# Altium PCB 插槽板.pcbdoc
Units mil, origin at the board's own origin, x right, y up, seen from the top; angles counter-clockwise.
Board outline 7231.36 x 4899.99 mil, 2 copper layers (Top Layer, Bottom Layer); 25 components, 57 nets, 197 pads, 15 vias.
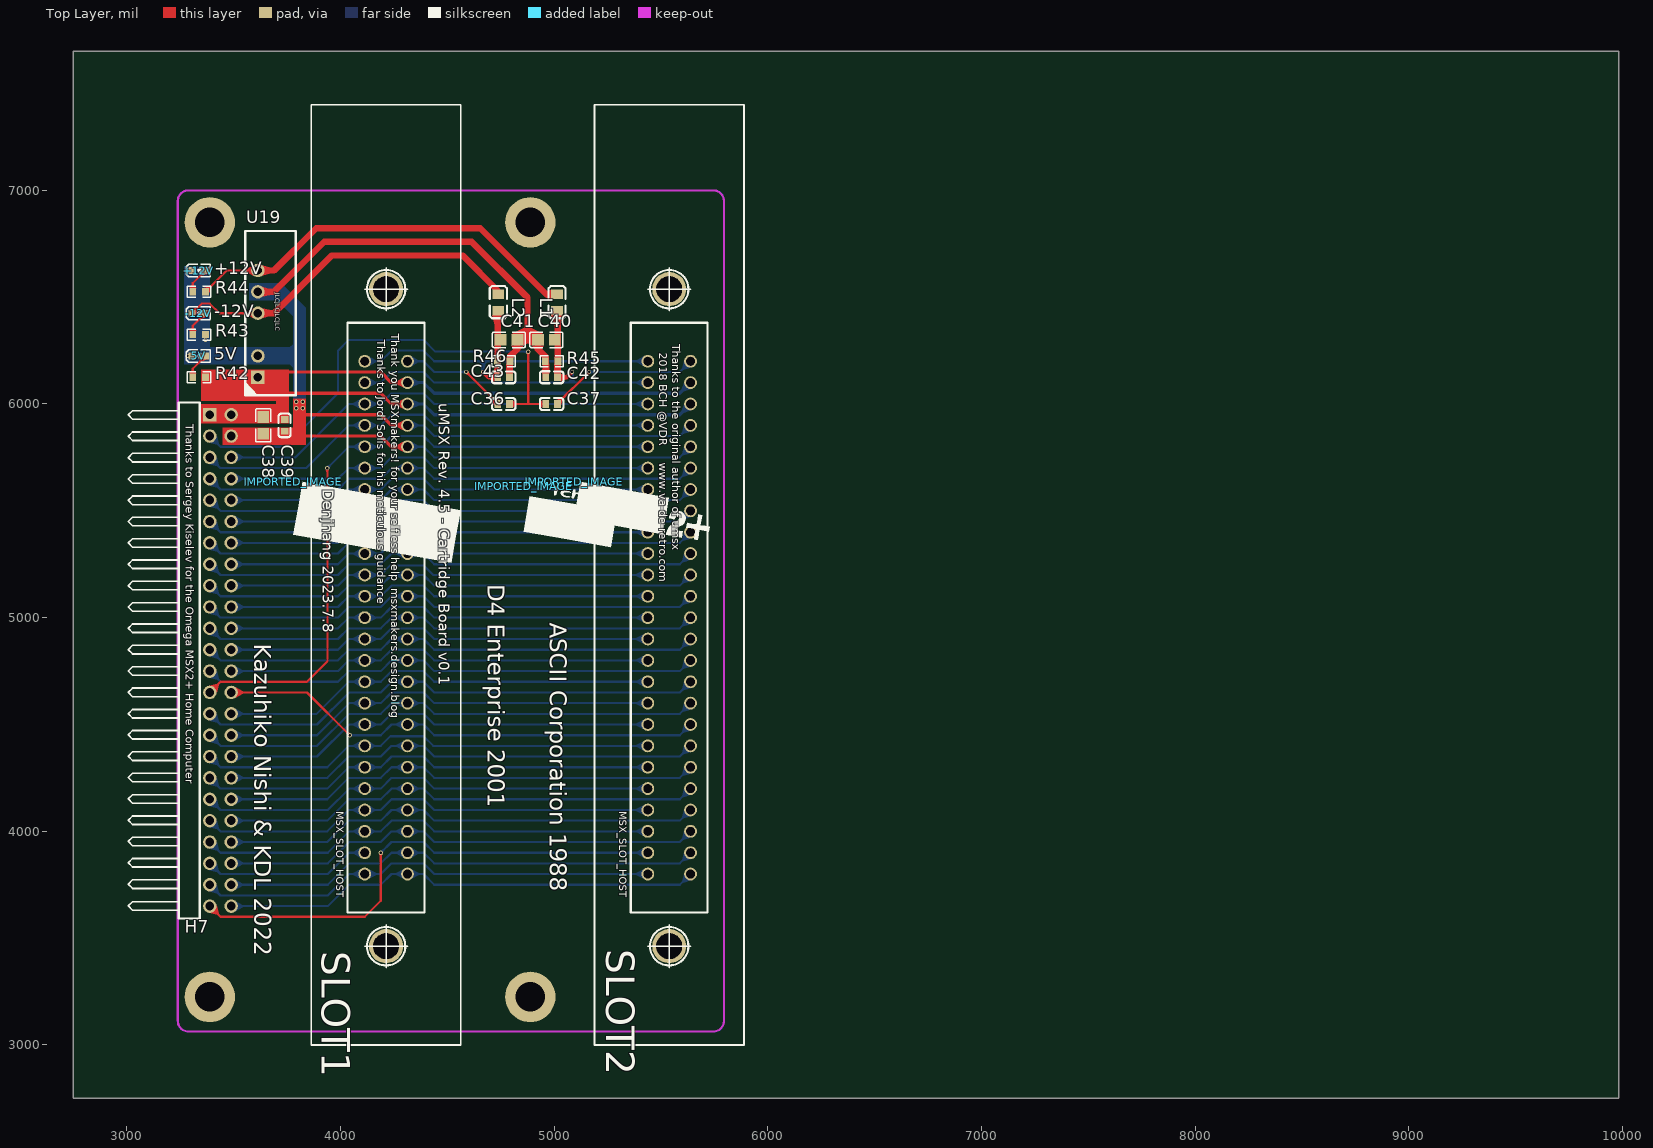
[diagram p0: Top Layer view]
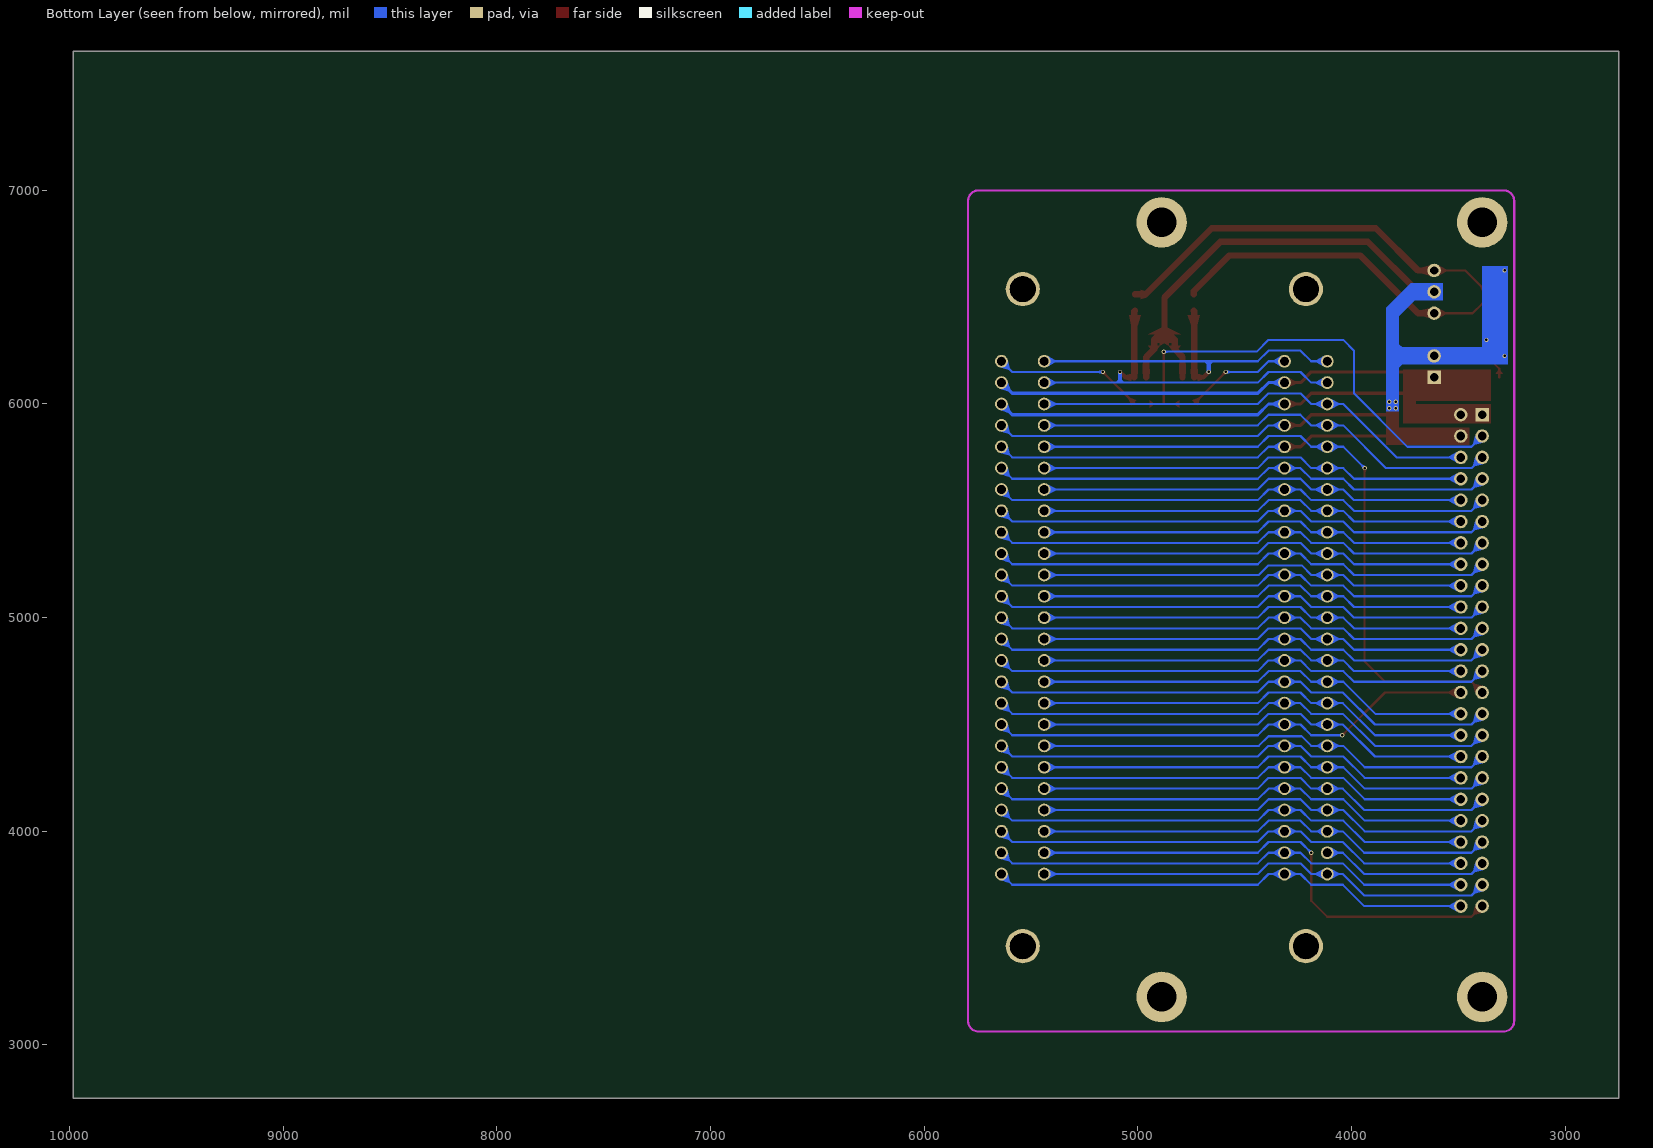
[diagram p1: Bottom Layer view, seen from below]

## Layer stack, top to bottom
Top Layer: signal copper (thickness not stored)
Dielectric: dielectric 12.6, FR-4, Dk 4.8
Bottom Layer: signal copper (thickness not stored)

## Board outline
9981.36,2750 2750,2750 2750,7649.99 9981.36,7649.99

## Components (designator, comment, footprint, x,y, rotation, side; value= is the part's Value field where it differs from the comment)
5V "LED_0603-R" LED_0603 3338.25,6224.97 r0 top
+12V "LED_0603-R" LED_0603 3338.25,6624.97 r0 top
-12V "LED_0603-R" LED_0603 3338.25,6424.97 r0 top
C36 "CAP_0603" C0603 4763.25,5999.97 r180 top
C37 "CAP_0603" C0603 4988.25,5999.97 r0 top
C38 "CL21A476MQYNNNE" C0805 3638.25,5899.97 r90 top
C39 "CAP_0603" C0603 3738.25,5899.97 r90 top
C40 "CL21A476MQYNNNE" C0805 4963.25,6299.97 r0 top
C41 "CL21A476MQYNNNE" C0805 4788.25,6299.97 r0 top
C42 "CAP_0603" C0603 4988.25,6124.97 r0 top
C43 "CAP_0603" C0603 4763.25,6124.97 r180 top
H7 "X6521WR-2x24H-C30D60" HDR-TH_48P-P2.54-H-M-R2-C24-S2.54 3438.25,4799.97 r270 top
IMPORTED_IMAGE "IMPORTED_IMAGE" IMPORTED_IMAGE 5092.88,5634.97 r0 top
IMPORTED_IMAGE "IMPORTED_IMAGE" IMPORTED_IMAGE 4856.67,5615.63 r0 top
IMPORTED_IMAGE "IMPORTED_IMAGE" IMPORTED_IMAGE 3779.24,5634.97 r0 top
L1 "A-6-9007-2" L0805 5013.25,6474.97 r270 top
L2 "A-6-9007-2" L0805 4738.25,6474.97 r270 top
R42 "0603WAF1001T5E" R0603 3338.25,6124.97 r180 top
R43 "0603WAF1001T5E" R0603 3338.25,6324.97 r180 top
R44 "0603WAF1001T5E" R0603 3338.25,6524.97 r180 top
R45 "0603WAF2001T5E" R0603 4988.25,6199.97 r0 top
R46 "0603WAF2001T5E" R0603 4763.25,6199.97 r180 top
SLOT1 "MSX_SLOT_HOST" CONN_EDGE_50P 4213.25,4999.97 r270 top
SLOT2 "MSX_SLOT_HOST" CONN_EDGE_50P 5538.25,4999.97 r270 top
U19 "A0512S-1W" PWRM-TH_7P-L19.5-W6.0-P2.54-PE3_7 3613.25,6374.97 r90 top

## Footprints (in the part's own frame and the unit in brackets; to place one, negate y for a bottom-side part, rotate by r counter-clockwise, add the part's x,y. Pads: shape width x height; smd on the part's side, far side on the other; paste and mask are expansions set on the pad)
C0603 [mm]
  rect 0.8x0.9 smd: 1(-0.7,0) 2(0.7,0)
  silkscreen extent -1.41,-0.71 1.39,0.72
C0805 [mm]
  rect 1.41x1.35 smd: 1(-1,0) 2(1,0)
  silkscreen extent -1.96,-0.9 1.96,0.9
CONN_EDGE_50P [mil]
  round 160 hole 120 slot 120.2 at 0 deg: 0(-1537.52,0) 0(1537.47,0)
  round 60 hole 40 slot 40.2 at 0 deg: 1(1199.97,100) 2(1199.97,-100) 3(1099.97,100) 4(1099.97,-100) 5(999.97,100) 6(999.97,-100) 7(899.97,100) 8(899.97,-100) 9(799.97,100) 10(799.97,-100) 11(699.97,100) 12(699.97,-100) 13(599.97,100) 14(599.97,-100) 15(499.97,100) 16(499.97,-100) 17(399.97,100) 18(399.97,-100) 19(299.97,100) 20(299.97,-100) 21(199.97,100) 22(199.97,-100) 23(99.97,100) 24(99.97,-100) 25(-0.03,100) 26(-0.03,-100) 27(-100.02,100) 28(-100.02,-100) 29(-200.02,100) 30(-200.02,-100) 31(-300.02,100) 32(-300.02,-100) 33(-400.02,100) 34(-400.02,-100) 35(-500.02,100) 36(-500.02,-100) 37(-600.02,100) 38(-600.02,-100) 39(-700.02,100) 40(-700.02,-100) 41(-800.02,100) 42(-800.02,-100) 43(-900.02,100) 44(-900.02,-100) 45(-1000.02,100) 46(-1000.02,-100) 47(-1100.02,100) 48(-1100.02,-100) 49(-1200.02,100) 50(-1200.02,-100)
  silkscreen extent -2400,-350 2000,350
HDR-TH_48P-P2.54-H-M-R2-C24-S2.54 [mm]
  rect 1.6x1.6 hole 1.05: 1(-29.21,-1.27)
  round 1.6 hole 1.05: 2(-29.21,1.27) 3(-26.67,-1.27) 4(-26.67,1.27) 5(-24.13,-1.27) 6(-24.13,1.27) 7(-21.59,-1.27) 8(-21.59,1.27) 9(-19.05,-1.27) 10(-19.05,1.27) 11(-16.51,-1.27) 12(-16.51,1.27) 13(-13.97,-1.27) 14(-13.97,1.27) 15(-11.43,-1.27) 16(-11.43,1.27) 17(-8.89,-1.27) 18(-8.89,1.27) 19(-6.35,-1.27) 20(-6.35,1.27) 21(-3.81,-1.27) 22(-3.81,1.27) 23(-1.27,-1.27) 24(-1.27,1.27) 25(1.27,-1.27) 26(1.27,1.27) 27(3.81,-1.27) 28(3.81,1.27) 29(6.35,-1.27) 30(6.35,1.27) 31(8.89,-1.27) 32(8.89,1.27) 33(11.43,-1.27) 34(11.43,1.27) 35(13.97,-1.27) 36(13.97,1.27) 37(16.51,-1.27) 38(16.51,1.27) 39(19.05,-1.27) 40(19.05,1.27) 41(21.59,-1.27) 42(21.59,1.27) 43(24.13,-1.27) 44(24.13,1.27) 45(26.67,-1.27) 46(26.67,1.27) 47(29.21,-1.27) 48(29.21,1.27)
  silkscreen extent -30.67,-10.97 30.67,-2.47
IMPORTED_IMAGE [mil]
  silkscreen extent 0,-271 635,0
L0805 [mil]
  rect 44.59x54.21 smd: 1(-38.04,0) 2(38.04,0)
  silkscreen extent -77,-40 73,40
LED_0603 [mil]
  rect 31.5x31.5 smd: 1(-33.5,-0.4) 2(29.5,-0.2)
  silkscreen extent -61,-30 53,30
PWRM-TH_7P-L19.5-W6.0-P2.54-PE3_7 [mm]
  rect 1.6x1.6 hole 1: 1(-6.35,0)
  round 1.6 hole 1: 2(-3.81,0) 4(1.27,0) 5(3.81,0) 6(6.35,0)
  silkscreen extent -8.51,-4.5 11.02,1.52
R0603 [mil]
  rect 31.75x34.02 smd: 1(-29.66,0) 2(29.66,0)
  silkscreen extent -55,-26 55,26

## Free pads (board coordinates)
  round 236.22 hole 137.8: 1(3388.25,3224.97) 1(3388.25,6849.97) 1(4888.25,3224.97) 1(4888.25,6849.97)

## Via types
v1: diameter 20, hole 12, Top Layer to Bottom Layer, 15 vias

## Nets (pads, with @x,y where several pads share a name; then routed paths per layer and width w, separated by ;. In a path a pad name is that pad's centre, name@x,y a point inside that pad or via, vN(x,y) a via of type N, cw(c..) or ccw(c..) an arc to the next point about the centre after c; other vN are vias at no path point)
$2N2106: C36.2 SLOT1.49 | length 506.8
  Top Layer w10: v1(4588.25,6149.97) 4735.69,6002.53 C36.2
  Bottom Layer w10: SLOT1.49 4388.23,6199.99 4438.25,6149.97 v1(4588.25,6149.97)
$2N2130: C37.2 SLOT2.49 | length 706.8
  Top Layer w10: C37.2 5015.81,6002.53 v1(5163.25,6149.97)
  Bottom Layer w10: v1(5163.25,6149.97) 5588.23,6149.97 SLOT2.49
$2N2392: 5V.2 R42.2 | length 124.3
  Top Layer w10: R42.2 3308.59,6165.61 5V.2
$2N2395: -12V.2 R43.2 | length 124.3
  Top Layer w10: R43.2 3308.59,6365.61 -12V.2
$2N2398: +12V.2 R44.2 | length 124.3
  Top Layer w10: R44.2 3308.59,6565.61 +12V.2
A0: H7.20 SLOT1.28 SLOT2.28 | length 2012.1
  Bottom Layer w10: H7.20 3988.25,5049.97 4038.25,5099.97 SLOT1.28@4113.23,5099.97 ; SLOT1.28 4188.27,5099.99 4238.25,5149.97 4388.25,5149.97 4438.23,5099.99 SLOT2.28
A1: H7.19 SLOT1.27 SLOT2.27 | length 2353.6
  Bottom Layer w10: H7.19 3438.25,4999.97 3988.25,4999.97 4038.25,5049.97 4188.25,5049.97 4238.27,5099.99 SLOT1.27 4388.23,5099.99 4438.25,5049.97 5588.23,5049.97 SLOT2.27
A2: H7.18 SLOT1.30 SLOT2.30 | length 2008
  Bottom Layer w10: H7.18 3988.25,5149.97 4038.25,5199.97 SLOT1.30@4113.23,5199.97 ; SLOT1.30 4188.27,5199.99 4233.25,5244.97 4388.25,5244.97 4433.23,5199.99 SLOT2.30
A3: H7.17 SLOT1.29 SLOT2.29 | length 2353.6
  Bottom Layer w10: H7.17 3438.25,5099.97 3988.25,5099.97 4038.25,5149.97 4188.25,5149.97 4238.27,5199.99 SLOT1.29 4388.23,5199.99 4438.25,5149.97 5588.23,5149.97 SLOT2.29
A4: H7.16 SLOT1.32 SLOT2.32 | length 2012.1
  Bottom Layer w10: H7.16 3988.25,5249.97 4038.25,5299.97 SLOT1.32@4113.23,5299.97 ; SLOT1.32 4188.27,5299.99 4238.25,5349.97 4388.25,5349.97 4438.23,5299.99 SLOT2.32
A5: H7.15 SLOT1.31 SLOT2.31 | length 2353.6
  Bottom Layer w10: H7.15 3438.25,5199.97 3988.25,5199.97 4038.25,5249.97 4188.25,5249.97 4238.27,5299.99 SLOT1.31 4388.23,5299.99 4438.25,5249.97 5588.23,5249.97 SLOT2.31
A6: H7.26 SLOT1.22 SLOT2.22 | length 2012.1
  Bottom Layer w10: H7.26 3988.25,4749.97 4038.25,4799.97 SLOT1.22@4113.22,4799.97 ; SLOT1.22 4188.28,4800 4238.25,4849.97 4388.26,4849.97 4438.23,4800 SLOT2.22
A7: H7.25 SLOT1.21 SLOT2.21 | length 2353.6
  Bottom Layer w10: H7.25 3438.25,4699.97 3988.25,4699.97 4038.25,4749.97 4188.25,4749.97 4238.28,4800 SLOT1.21 4388.22,4800 4438.25,4749.97 5588.22,4749.97 SLOT2.21
A8: H7.24 SLOT1.24 SLOT2.24 | length 2012.1
  Bottom Layer w10: H7.24 3988.25,4849.97 4038.25,4899.97 SLOT1.24@4113.22,4899.97 ; SLOT1.24 4188.28,4900 4238.25,4949.97 4388.26,4949.97 4438.23,4900 SLOT2.24
A9: H7.31 SLOT1.17 SLOT2.17 | length 2395
  Bottom Layer w10: H7.31 3438.25,4399.97 3890.22,4399.97 4040.22,4549.97 4188.25,4549.97 4238.28,4600 SLOT1.17 4388.22,4600 4438.25,4549.97 5588.22,4549.97 SLOT2.17
A10: H7.30 SLOT1.20 SLOT2.20 | length 2053.5
  Bottom Layer w10: H7.30 3888.25,4549.97 4038.28,4700 SLOT1.20 4188.28,4700 4238.25,4749.97 4388.25,4749.97 4438.22,4700 SLOT2.20
A11: H7.29 SLOT1.19 SLOT2.19 | length 2395
  Bottom Layer w10: H7.29 3438.25,4499.97 3890.22,4499.97 4040.22,4649.97 4188.25,4649.97 4238.28,4700 SLOT1.19 4388.22,4700 4438.25,4649.97 5588.22,4649.97 SLOT2.19
A12: H7.23 SLOT1.23 SLOT2.23 | length 2353.6
  Bottom Layer w10: H7.23 3438.25,4799.97 3988.25,4799.97 4038.25,4849.97 4188.25,4849.97 4238.28,4900 SLOT1.23 4388.23,4900 4438.26,4849.97 5588.22,4849.97 SLOT2.23
A13: H7.22 SLOT1.26 SLOT2.26 | length 2012.1
  Bottom Layer w10: H7.22 3988.25,4949.97 4038.25,4999.97 SLOT1.26@4113.22,4999.97 ; SLOT1.26 4188.27,5000 4238.24,5049.97 4388.26,5049.97 4438.23,5000 SLOT2.26
A14: H7.21 SLOT1.25 SLOT2.25 | length 2353.6
  Bottom Layer w10: H7.21 3438.25,4899.97 3988.25,4899.97 4038.25,4949.97 4188.25,4949.97 4238.28,5000 SLOT1.25 4388.23,5000 4438.26,4949.97 5588.22,4949.97 SLOT2.25
A15: H7.32 SLOT1.18 SLOT2.18 | length 2053.5
  Bottom Layer w10: H7.32 3890.22,4449.97 4040.25,4600 SLOT1.18 4188.28,4600 4238.25,4649.97 4388.25,4649.97 4438.22,4600 SLOT2.18
BDIR: H7.37 SLOT1.10 SLOT2.10 | length 2198.5
  Bottom Layer w10: H7.37 3438.25,4099.97 3940.22,4099.97 4040.22,4199.97 SLOT1.10 4158.19,4199.97 ; SLOT1.10 4158.19,4200 4188.28,4200 4238.25,4249.97 4388.25,4249.97 4438.22,4200 SLOT2.10
CLOCK: H7.27 SLOT1.42 SLOT2.42 | length 3097.9
  Top Layer w10: H7.27 3438.25,4699.97 3843.25,4699.97 3938.25,4794.97 v1(3938.25,5699.97)
  Bottom Layer w10: v1(3938.25,5699.97) 4038.27,5799.99 SLOT1.42 4188.25,5799.99 4238.23,5849.97 4388.27,5849.97 4438.25,5799.99 SLOT2.42
CS1: H7.48 SLOT1.1 SLOT2.1 | length 2253.6
  Bottom Layer w10: H7.48 3940.22,3649.97 4040.22,3749.97 4188.24,3749.97 4238.27,3800 SLOT1.1 4388.22,3800 4438.25,3749.97 5588.22,3749.97 SLOT2.1
CS2: H7.45 SLOT1.2 SLOT2.2 | length 2153.5
  Bottom Layer w10: H7.45 3438.25,3699.97 3940.22,3699.97 4040.25,3800 SLOT1.2 4188.27,3800 4238.24,3849.97 4388.25,3849.97 4438.22,3800 SLOT2.2
CS12: H7.46 SLOT1.3 SLOT2.3 | length 2253.6
  Bottom Layer w10: H7.46 3940.22,3749.97 4040.22,3849.97 4188.25,3849.97 4238.28,3900 SLOT1.3 4388.22,3900 4438.25,3849.97 5588.22,3849.97 SLOT2.3
D0: H7.14 SLOT1.34 SLOT2.34 | length 2012.1
  Bottom Layer w10: H7.14 3988.25,5349.97 4038.25,5399.97 SLOT1.34@4113.23,5399.97 ; SLOT1.34 4188.27,5399.99 4238.25,5449.97 4388.25,5449.97 4438.23,5399.99 SLOT2.34
D1: H7.13 SLOT1.33 SLOT2.33 | length 2353.6
  Bottom Layer w10: H7.13 3438.25,5299.97 3988.25,5299.97 4038.25,5349.97 4188.25,5349.97 4238.27,5399.99 SLOT1.33 4388.23,5399.99 4438.25,5349.97 5588.23,5349.97 SLOT2.33
D2: H7.12 SLOT1.36 SLOT2.36 | length 2012.1
  Bottom Layer w10: H7.12 3988.25,5449.97 4038.25,5499.97 SLOT1.36@4113.23,5499.97 ; SLOT1.36 4188.27,5499.99 4238.25,5549.97 4388.25,5549.97 4438.23,5499.99 SLOT2.36
D3: H7.11 SLOT1.35 SLOT2.35 | length 2353.6
  Bottom Layer w10: H7.11 3438.25,5399.97 3988.25,5399.97 4038.25,5449.97 4188.25,5449.97 4238.27,5499.99 SLOT1.35 4388.23,5499.99 4438.25,5449.97 5588.23,5449.97 SLOT2.35
D4: H7.10 SLOT1.38 SLOT2.38 | length 2012.1
  Bottom Layer w10: H7.10 3988.25,5549.97 4038.27,5599.99 SLOT1.38 4188.27,5599.99 4238.25,5649.97 4388.25,5649.97 4438.23,5599.99 SLOT2.38
D5: H7.9 SLOT1.37 SLOT2.37 | length 2353.6
  Bottom Layer w10: H7.9 3438.25,5499.97 3988.25,5499.97 4038.25,5549.97 4188.25,5549.97 4238.27,5599.99 SLOT1.37 4388.23,5599.99 4438.25,5549.97 5588.23,5549.97 SLOT2.37
D6: H7.8 SLOT1.40 SLOT2.40 | length 2012.1
  Bottom Layer w10: H7.8 3988.25,5649.97 4038.27,5699.99 SLOT1.40 4188.27,5699.99 4238.25,5749.97 4388.25,5749.97 4438.23,5699.99 SLOT2.40
D7: H7.7 SLOT1.39 SLOT2.39 | length 2353.6
  Bottom Layer w10: H7.7 3438.25,5599.97 3988.27,5599.97 4038.27,5649.97 4188.25,5649.97 4238.27,5699.99 SLOT1.39 4388.23,5699.99 4438.25,5649.97 5588.23,5649.97 SLOT2.39
GND: 5V.1 +12V.1 C38.1 C39.1 C40.1 C41.2 C42.1 C43.1 H7.4 R43.1 R45.1 R46.1 SLOT1.41 SLOT1.43 SLOT2.41 SLOT2.43 U19.2 U19.5 | length 6013
  Top Layer w15: 3833.25,5849.97 4188.25,5849.97 4238.23,5799.99 SLOT1.41 ; 3833.25,5949.97 4188.25,5949.97 4238.23,5899.99 SLOT1.43
  Top Layer w30: U19.5 3688.25,6524.97 3923.25,6759.97 4613.25,6759.97 4875.12,6498.1 4875.12,6348.73 ; C43.1 4790.81,6219.59 4827.62,6256.4 C41.2 ; C42.1 4960.69,6219.59 4923.88,6256.4 C40.1 ; C41.2 4875.12,6299.97 ; C41.2 4875.12,6347.47 ; 4875.12,6299.97 4875.12,6347.47 ; 4875.12,6299.97 C40.1 ; 4875.12,6347.47 4875.12,6348.73 ; 4875.12,6348.73 C40.1
  Bottom Layer w10: SLOT1.41 4388.23,5799.99 4438.25,5749.97 5588.23,5749.97 SLOT2.41 ; SLOT1.43 4388.23,5899.99 4438.25,5849.97 5588.23,5849.97 SLOT2.43
  other v1: 3793.25,5979.97 3823.25,5979.97 3793.25,6009.97 3823.25,6009.97 3283.25,6224.97 3368.25,6299.97 3283.25,6624.97
INT: H7.39 SLOT1.8 SLOT2.8 | length 2198.5
  Bottom Layer w10: H7.39 3438.25,3999.97 3938.25,3999.97 4038.25,4099.97 SLOT1.8 4158.19,4099.97 ; SLOT1.8 4158.19,4100 4188.28,4100 4238.25,4149.97 4388.25,4149.97 4438.22,4100 SLOT2.8
IORQ: H7.38 SLOT1.11 SLOT2.11 | length 2253.6
  Bottom Layer w10: H7.38 3938.25,4149.97 4038.25,4249.97 4188.25,4249.97 4238.28,4300 SLOT1.11 4388.22,4300 4438.25,4249.97 5588.22,4249.97 SLOT2.11
M1: H7.40 SLOT1.9 SLOT2.9 | length 2253.6
  Bottom Layer w10: H7.40 3938.25,4049.97 4038.25,4149.97 4188.25,4149.97 4238.28,4200 SLOT1.9 4388.22,4200 4438.25,4149.97 5588.22,4149.97 SLOT2.9
MERQ: H7.35 SLOT1.12 SLOT2.12 | length 2153.5
  Bottom Layer w10: H7.35 3438.25,4199.97 3938.25,4199.97 4038.28,4300 SLOT1.12 4188.28,4300 4238.25,4349.97 4388.25,4349.97 4438.22,4300 SLOT2.12
RD: H7.33 SLOT1.14 SLOT2.14 | length 2194.3
  Bottom Layer w10: H7.33 3438.25,4299.97 3938.25,4299.97 4038.25,4399.97 SLOT1.14 4158.19,4399.97 ; SLOT1.14 4158.19,4400 4188.28,4400 4233.25,4444.97 4388.28,4444.97 4433.25,4400 SLOT2.14
RESET: H7.28 SLOT1.15 SLOT2.15 | length 2295
  Top Layer w10: H7.28 3843.25,4649.97 v1(4043.25,4449.97)
  Bottom Layer w10: v1(4043.25,4449.97) 4188.25,4449.97 4238.28,4500 SLOT1.15 4388.22,4500 4438.25,4449.97 5588.22,4449.97 SLOT2.15
RFSH: H7.41 SLOT1.6 SLOT2.6 | length 2198.5
  Bottom Layer w10: H7.41 3438.25,3899.97 3940.22,3899.97 4040.22,3999.97 SLOT1.6 4158.19,3999.97 ; SLOT1.6 4158.19,4000 4188.28,4000 4238.25,4049.97 4388.25,4049.97 4438.22,4000 SLOT2.6
RSV5: H7.44 SLOT1.5 SLOT2.5 | length 2253.6
  Bottom Layer w10: H7.44 3940.22,3849.97 4040.22,3949.97 4188.25,3949.97 4238.28,4000 SLOT1.5 4388.22,4000 4438.25,3949.97 5588.22,3949.97 SLOT2.5
RSV16: H7.34 SLOT1.16 SLOT2.16 | length 2053.5
  Bottom Layer w10: H7.34 3890.22,4349.97 4040.25,4500 SLOT1.16 4188.28,4500 4238.25,4549.97 4388.25,4549.97 4438.22,4500 SLOT2.16
SLTSL1: H7.43 SLOT1.4 | length 787.1
  Bottom Layer w10: H7.43 3438.25,3799.97 3940.22,3799.97 4040.22,3899.97 SLOT1.4
SLTSL2: H7.47 SLOT2.4 | length 2368.2
  Top Layer w10: H7.47 3438.25,3599.97 4113.25,3599.97 4188.25,3674.97 v1(4188.25,3899.97)
  Bottom Layer w10: v1(4188.25,3899.97) 4238.26,3949.97 4388.25,3949.97 4438.22,3900 SLOT2.4
SOUND_L: C36.1 C37.1 H7.3 | length 2273
  Top Layer w10: C36.1 4879.02,5999.97 ; v1(4878.25,6244.97) 4878.25,6000.73 4879.02,5999.97 ; C37.1 4879.02,5999.97
  Bottom Layer w10: H7.3 3438.25,5799.97 3738.25,5799.97 3988.25,6049.97 3988.25,6249.97 4038.25,6299.97 4388.25,6299.97 4443.25,6244.97 v1(4878.25,6244.97)
SW1: H7.5 SLOT1.44 SLOT2.44 | length 2195
  Bottom Layer w10: H7.5 3438.25,5699.97 3838.25,5699.97 4038.27,5899.99 SLOT1.44 4189.27,5899.99 4239.25,5949.97 4388.27,5949.97 4438.25,5899.99 SLOT2.44
SW2: H7.6 SLOT1.46 SLOT2.46 | length 2095
  Bottom Layer w10: H7.6 3789.23,5749.97 4039.25,5999.99 SLOT1.46 4188.25,5999.99 4238.23,6049.97 4388.27,6049.97 4438.25,5999.99 SLOT2.46
VCC5: C38.2 C39.2 H7.1 H7.2 R42.1 SLOT1.45 SLOT1.47 SLOT2.45 SLOT2.47 U19.1 | length 3914.3
  Top Layer w15: 3733.25,6149.97 4188.27,6149.97 4238.25,6099.99 SLOT1.47 ; 3753.25,6049.97 4188.27,6049.97 4238.25,5999.99 SLOT1.45
  Bottom Layer w15: SLOT1.45 4388.23,5999.99 4438.25,5949.97 5588.23,5949.97 SLOT2.45 ; SLOT1.47 4388.23,6099.99 4438.25,6049.97 5588.23,6049.97 SLOT2.47
VCC12: L1.1 R44.1 U19.6 | length 1897.2
  Top Layer w10: R44.1 3467.91,6624.97 U19.6
  Top Layer w30: U19.6 3688.25,6624.97 3886.29,6823.01 4653.25,6823.01 4963.25,6513.01 L1.1
VCC12L: C40.2 C42.2 L1.2 R45.2 SLOT1.48 SLOT2.48 | length 1844.1
  Top Layer w20: C42.2 5058.25,6124.97 v1(5083.25,6149.97)
  Top Layer w30: L1.2 5015.81,6434.37 C42.2
  Bottom Layer w10: SLOT1.48 4188.27,6099.99 4238.25,6149.97 4388.25,6149.97 4438.25,6099.97 5066.66,6099.97 ; SLOT2.48@5438.23,6099.97 5099.85,6099.97 ; 5066.66,6099.97 5083.25,6116.57 5099.85,6099.97 ; 5066.66,6099.97 5099.85,6099.97
  Bottom Layer w20: 5083.25,6109.97 5083.25,6116.57 v1(5083.25,6149.97)
VCCM12: -12V.1 L2.1 U19.4 | length 1666.9
  Top Layer w10: -12V.1 3350.15,6469.97 3388.25,6469.97 3433.25,6424.97 U19.4
  Top Layer w30: U19.4 3688.25,6424.97 3958.25,6694.97 4571.29,6694.97 4738.25,6528.01 L2.1
VCCM12L: C41.1 C43.2 L2.2 R46.2 SLOT1.50 SLOT2.50 | length 1846.9
  Top Layer w20: v1(4668.25,6149.97) 4693.25,6124.97 C43.2
  Top Layer w30: C43.2 4735.69,6434.37 L2.2
  Bottom Layer w10: SLOT1.50 4188.27,6199.99 4238.25,6249.97 4388.25,6249.97 4438.25,6199.97 4650.69,6199.97 ; SLOT2.50@5438.23,6199.97 4685.81,6199.97 ; 4650.69,6199.97 4668.25,6182.41 4685.81,6199.97 ; 4650.69,6199.97 4685.81,6199.97
  Bottom Layer w20: v1(4668.25,6149.97) 4668.25,6182.41 4668.25,6189.97
WAIT: H7.42 SLOT1.7 SLOT2.7 | length 2253.6
  Bottom Layer w10: H7.42 3938.25,3949.97 4038.25,4049.97 4188.25,4049.97 4238.28,4100 SLOT1.7 4388.22,4100 4438.25,4049.97 5588.22,4049.97 SLOT2.7
WR: H7.36 SLOT1.13 SLOT2.13 | length 2253.6
  Bottom Layer w10: H7.36 3938.25,4249.97 4038.25,4349.97 4188.25,4349.97 4238.28,4400 SLOT1.13 4388.22,4400 4438.25,4349.97 5588.22,4349.97 SLOT2.13
"": pad.1 SLOT1.0 SLOT2.0

## Keep-outs
Board Outline Layer:
  lines w10 net "": 3238.25,3112.96 ccw(c3288.25,3112.96) 3288.25,3062.96 5744.35,3062.96 ccw(c5744.35,3112.96) 5794.35,3112.96 5794.35,6949.97 ccw(c5744.35,6949.97) 5744.35,6999.97 3288.25,6999.97 ccw(c3288.25,6949.97) 3238.25,6949.97 3238.25,3112.96

## Other copper
Top Layer:
  region net GND: 3448.25,5809.97 3838.25,5809.97 3838.25,5889.97 3448.25,5889.97
  region net GND: 3778.25,5879.97 3838.25,5879.97 3838.25,6024.97 3778.25,6024.97
  region net VCC5: 3348.25,5909.97 3758.25,5909.97 3758.25,6159.97 3348.25,6159.97 3348.25,6014.97 3698.25,6014.97 3698.25,5999.97 3348.25,5999.97
  region net VCC12L: 5000.81,6187.69 5000.06,6142.69 5031.56,6142.69 5030.81,6187.69
  region net VCC12L: 5058.25,6114.97 5058.25,6134.97 5031.56,6142.69 5031.56,6107.25
  region net GND: 4945.69,6187.69 4944.94,6142.69 4976.44,6142.69 4975.69,6187.69
  region net CLOCK: 3419.69,4648 3429.65,4684.3 3422.58,4691.37 3386.28,4681.4
  region net RESET: 3509.08,4626.35 3541.79,4644.97 3541.79,4654.97 3509.08,4673.59
  region net SLTSL2: 3386.28,3618.54 3422.58,3608.57 3429.65,3615.64 3419.69,3651.94
  region net VCC12: 4963.25,6498.01 4986.14,6490.72 4986.14,6535.3 4963.25,6528.01
  region net VCC12L: 5000.81,6369.64 5030.81,6369.64 5040.36,6414.64 4986.14,6414.64
  region net VCCM12: 3634.08,6401.35 3666.79,6409.97 3666.79,6439.97 3634.08,6448.59
  region net VCCM12: 3592.42,6448.59 3559.71,6429.97 3559.71,6419.97 3592.42,6401.35
  region net VCC12: 3592.42,6648.59 3559.71,6629.97 3559.71,6619.97 3592.42,6601.35
  region net VCC12: 3634.08,6601.35 3666.79,6609.97 3666.79,6639.97 3634.08,6648.59
  region net GND: 3634.08,6501.35 3666.79,6509.97 3666.79,6539.97 3634.08,6548.59
  region net $2N2130: 5042.17,6021.81 5034.5,6028.29 5006.22,6017.69 5031.56,5993.53
  region net SOUND_L: 4929.94,5994.97 4944.94,5982.47 4944.94,6017.47 4929.94,6004.97
  region net $2N2106: 4717,6028.29 4709.34,6021.81 4719.94,5993.53 4745.28,6017.69
  region net SOUND_L: 4821.56,5994.97 4821.56,6004.97 4806.56,6017.47 4806.56,5982.47
  region net $2N2392: 3341.39,6205.48 3348.47,6198.41 3376.75,6209.02 3352,6233.77
  region net $2N2398: 3341.39,6605.48 3348.47,6598.41 3376.75,6609.02 3352,6633.77
  region net VCCM12: 3324.04,6450.93 3295.75,6440.32 3320.5,6415.57 3331.11,6443.86
  region net $2N2395: 3341.39,6405.48 3348.47,6398.41 3376.75,6409.02 3352,6433.77
  region net GND: 4864.51,6358.08 4799.86,6326.55 4855.38,6326.55 4885.73,6336.86
  region net GND: 4812.62,6256.4 4842.62,6256.4 4855.38,6273.4 4799.86,6273.4
  region net GND: 4875.12,6284.97 4875.12,6314.97 4855.38,6326.55 4855.38,6273.4
  region net GND: 4864.51,6338.12 4896.12,6326.55 4951.64,6326.55 4886.7,6358.36
  region net GND: 4908.88,6256.4 4938.88,6256.4 4951.64,6273.4 4896.12,6273.4
  region net GND: 4875.12,6284.97 4896.12,6273.4 4896.12,6326.55 4875.12,6314.97
  region net VCCM12L: 4693.25,6134.97 4693.25,6114.97 4719.94,6107.25 4719.94,6142.69
  region net VCCM12L: 4720.69,6187.69 4719.94,6142.69 4751.44,6142.69 4750.69,6187.69
  region net GND: 4775.81,6187.69 4775.06,6142.69 4806.56,6142.69 4805.81,6187.69
  region net $2N2398: 3303.59,6556.98 3292.72,6541.98 3324.47,6541.98 3313.59,6556.98
  region net VCC12: 3388.45,6552.58 3360.17,6541.98 3383.79,6516.1 3394.39,6544.38
  region net $2N2395: 3303.59,6356.98 3292.72,6341.98 3324.47,6341.98 3313.59,6356.98
  region net $2N2392: 3303.59,6156.98 3292.72,6141.98 3324.47,6141.98 3313.59,6156.98
  region net VCCM12L: 4720.69,6369.64 4750.69,6369.64 4765.36,6414.64 4711.14,6414.64
  region net $2N2130: 5153.27,6150.6 5147.69,6141.48 5154.77,6134.41 5163.88,6139.99
  region net $2N2106: 4587.62,6139.99 4596.74,6134.41 4603.81,6141.48 4598.23,6150.6
  region net SOUND_L: 4870.75,6238.36 4873.25,6227.97 4883.25,6227.97 4885.75,6238.36
  region net RESET: 4043.88,4459.95 4034.77,4465.53 4027.69,4458.46 4033.27,4449.34
  region net SLTSL2: 4180.75,3893.36 4183.25,3882.97 4193.25,3882.97 4195.75,3893.36
  region net CLOCK: 3930.75,5693.36 3933.25,5682.97 3943.25,5682.97 3945.75,5693.36
  region net GND: 4293.41,5822.49 4262.25,5807.49 4262.25,5792.49 4293.41,5777.49
  region net GND: 4293.41,5922.49 4262.25,5907.49 4262.25,5892.49 4293.41,5877.49
  region net VCC5: 4293.41,6022.49 4262.25,6007.49 4262.25,5992.49 4293.41,5977.49
  region net VCC5: 4293.41,6122.49 4262.25,6107.49 4262.25,6092.49 4293.41,6077.49
Bottom Layer:
  region net GND: 3838.25,5964.97 3838.25,6449.97 3723.25,6564.97 3573.25,6564.97 3573.25,6484.97 3703.25,6484.97 3778.25,6409.97 3778.25,6279.97 3763.25,6264.97 3388.25,6264.97 3388.25,6644.97 3268.25,6644.97 3268.25,6184.97 3763.25,6184.97 3778.25,6169.97 3778.25,5964.97
  region net VCCM12L: 5418.39,6222.48 5387.25,6204.97 5387.25,6194.97 5418.42,6177.48
  region net $2N2130: 5608.31,6201.87 5598.65,6167.46 5605.72,6160.39 5640.13,6170.05
  region net VCC12L: 5418.39,6122.48 5387.25,6104.97 5387.25,6094.97 5418.42,6077.48
  region net VCC5: 5608.31,6101.87 5596.89,6069.23 5607.49,6058.62 5640.13,6070.05
  region net SW2: 5418.41,6022.49 5387.25,6004.99 5387.25,5994.99 5418.41,5977.49
  region net VCC5: 5608.31,6001.87 5596.89,5969.23 5607.49,5958.62 5640.13,5970.05
  region net SW1: 5418.41,5922.49 5387.25,5904.99 5387.25,5894.99 5418.41,5877.49
  region net GND: 5608.31,5901.87 5598.65,5867.46 5605.72,5860.39 5640.13,5870.05
  region net CLOCK: 5418.41,5822.49 5387.25,5804.99 5387.25,5794.99 5418.41,5777.49
  region net GND: 5608.31,5801.87 5598.65,5767.46 5605.72,5760.39 5640.13,5770.05
  region net D6: 5418.41,5722.49 5387.25,5704.99 5387.25,5694.99 5418.41,5677.49
  region net D7: 5608.31,5701.87 5598.65,5667.46 5605.72,5660.39 5640.13,5670.05
  region net D4: 5418.41,5622.49 5387.25,5604.99 5387.25,5594.99 5418.41,5577.49
  region net D5: 5608.31,5601.87 5598.65,5567.46 5605.72,5560.39 5640.13,5570.05
  region net D2: 5418.41,5522.49 5387.25,5504.99 5387.25,5494.99 5418.41,5477.49
  region net D3: 5608.31,5501.87 5598.65,5467.46 5605.72,5460.39 5640.13,5470.05
  region net D0: 5418.41,5422.49 5387.25,5404.99 5387.25,5394.99 5418.41,5377.49
  region net D1: 5608.31,5401.87 5598.65,5367.46 5605.72,5360.39 5640.13,5370.05
  region net A4: 5418.41,5322.49 5387.25,5304.99 5387.25,5294.99 5418.41,5277.49
  region net A5: 5608.31,5301.87 5598.65,5267.46 5605.72,5260.39 5640.13,5270.05
  region net A2: 5418.41,5222.49 5387.25,5204.99 5387.25,5194.99 5418.41,5177.49
  region net A3: 5608.31,5201.87 5598.65,5167.46 5605.72,5160.39 5640.13,5170.05
  region net A0: 5418.41,5122.49 5387.25,5104.99 5387.25,5094.99 5418.41,5077.49
  region net A1: 5608.31,5101.87 5598.65,5067.46 5605.72,5060.39 5640.13,5070.05
  region net A13: 5418.41,5022.5 5387.25,5005 5387.25,4995 5418.41,4977.5
  region net A14: 5608.31,5001.88 5598.65,4967.47 5605.72,4960.4 5640.13,4970.06
  region net A8: 5418.41,4922.5 5387.25,4905 5387.25,4895 5418.41,4877.5
  region net A12: 5608.31,4901.88 5598.65,4867.47 5605.72,4860.4 5640.13,4870.06
  region net A6: 5418.41,4822.5 5387.25,4805 5387.25,4795 5418.41,4777.5
  region net A7: 5608.31,4801.88 5598.65,4767.47 5605.72,4760.4 5640.13,4770.06
  region net A10: 5418.41,4722.5 5387.25,4705 5387.25,4695 5418.41,4677.5
  region net A11: 5608.31,4701.88 5598.65,4667.47 5605.72,4660.4 5640.13,4670.06
  region net A15: 5418.41,4622.5 5387.25,4605 5387.25,4595 5418.41,4577.5
  region net A9: 5608.31,4601.88 5598.65,4567.47 5605.72,4560.4 5640.13,4570.06
  region net RSV16: 5418.41,4522.5 5387.25,4505 5387.25,4495 5418.41,4477.5
  region net RESET: 5608.31,4501.88 5598.65,4467.47 5605.72,4460.4 5640.13,4470.06
  region net RD: 5418.41,4422.5 5387.25,4405 5387.25,4395 5418.41,4377.5
  region net WR: 5608.31,4401.88 5598.65,4367.47 5605.72,4360.4 5640.13,4370.06
  region net MERQ: 5418.41,4322.5 5387.25,4305 5387.25,4295 5418.41,4277.5
  region net IORQ: 5608.31,4301.88 5598.65,4267.47 5605.72,4260.4 5640.13,4270.06
  region net BDIR: 5418.41,4222.5 5387.25,4205 5387.25,4195 5418.41,4177.5
  region net M1: 5608.31,4201.88 5598.65,4167.47 5605.72,4160.4 5640.13,4170.06
  region net INT: 5418.41,4122.5 5387.25,4105 5387.25,4095 5418.41,4077.5
  region net WAIT: 5608.31,4101.88 5598.65,4067.47 5605.72,4060.4 5640.13,4070.06
  region net RFSH: 5418.41,4022.5 5387.25,4005 5387.25,3995 5418.41,3977.5
  region net RSV5: 5608.31,4001.88 5598.65,3967.47 5605.72,3960.4 5640.13,3970.06
  region net SLTSL2: 5418.41,3922.5 5387.25,3905 5387.25,3895 5418.41,3877.5
  region net CS12: 5608.31,3901.88 5598.65,3867.47 5605.72,3860.4 5640.13,3870.06
  region net CS2: 5418.41,3822.5 5387.25,3805 5387.25,3795 5418.41,3777.5
  region net CS1: 5608.31,3801.88 5598.65,3767.47 5605.72,3760.4 5640.13,3770.06
  region net D4: 3509.08,5526.35 3541.79,5544.97 3541.79,5554.97 3509.08,5573.59
  region net D5: 3386.28,5518.54 3422.58,5508.57 3429.65,5515.64 3419.69,5551.94
  region net D6: 3509.08,5626.35 3541.79,5644.97 3541.79,5654.97 3509.08,5673.59
  region net D7: 3386.28,5618.54 3422.58,5608.57 3429.65,5615.64 3419.69,5651.94
  region net SW2: 3509.08,5726.35 3541.79,5744.97 3541.79,5754.97 3509.08,5773.59
  region net SW1: 3386.28,5718.54 3422.58,5708.57 3429.65,5715.64 3419.69,5751.94
  region net SOUND_L: 3386.28,5818.54 3422.58,5808.57 3429.65,5815.64 3419.69,5851.94
  region net D3: 3386.28,5418.54 3422.58,5408.57 3429.65,5415.64 3419.69,5451.94
  region net D2: 3509.08,5426.35 3541.79,5444.97 3541.79,5454.97 3509.08,5473.59
  region net D1: 3386.28,5318.54 3422.58,5308.57 3429.65,5315.64 3419.69,5351.94
  region net D0: 3509.08,5326.35 3541.79,5344.97 3541.79,5354.97 3509.08,5373.59
  region net A5: 3386.28,5218.54 3422.58,5208.57 3429.65,5215.64 3419.69,5251.94
  region net A4: 3509.08,5226.35 3541.79,5244.97 3541.79,5254.97 3509.08,5273.59
  region net A3: 3386.28,5118.54 3422.58,5108.57 3429.65,5115.64 3419.69,5151.94
  region net A2: 3509.08,5126.35 3541.79,5144.97 3541.79,5154.97 3509.08,5173.59
  region net A1: 3386.28,5018.54 3422.58,5008.57 3429.65,5015.64 3419.69,5051.94
  region net A0: 3509.08,5026.35 3541.79,5044.97 3541.79,5054.97 3509.08,5073.59
  region net A14: 3386.28,4918.54 3422.58,4908.57 3429.65,4915.64 3419.69,4951.94
  region net A13: 3509.08,4926.35 3541.79,4944.97 3541.79,4954.97 3509.08,4973.59
  region net A12: 3386.28,4818.54 3422.58,4808.57 3429.65,4815.64 3419.69,4851.94
  region net A8: 3509.08,4826.35 3541.79,4844.97 3541.79,4854.97 3509.08,4873.59
  region net A7: 3386.28,4718.54 3422.58,4708.57 3429.65,4715.64 3419.69,4751.94
  region net A6: 3509.08,4726.35 3541.79,4744.97 3541.79,4754.97 3509.08,4773.59
  region net A11: 3386.28,4518.54 3422.58,4508.57 3429.65,4515.64 3419.69,4551.94
  region net A10: 3509.08,4526.35 3541.79,4544.97 3541.79,4554.97 3509.08,4573.59
  region net A9: 3386.28,4418.54 3422.58,4408.57 3429.65,4415.64 3419.69,4451.94
  region net A15: 3509.08,4426.35 3541.79,4444.97 3541.79,4454.97 3509.08,4473.59
  region net RD: 3386.28,4318.54 3422.58,4308.57 3429.65,4315.64 3419.69,4351.94
  region net RSV16: 3509.08,4326.35 3541.79,4344.97 3541.79,4354.97 3509.08,4373.59
  region net MERQ: 3386.28,4218.54 3422.58,4208.57 3429.65,4215.64 3419.69,4251.94
  region net WR: 3509.08,4226.35 3541.79,4244.97 3541.79,4254.97 3509.08,4273.59
  region net BDIR: 3386.28,4118.54 3422.58,4108.57 3429.65,4115.64 3419.69,4151.94
  region net IORQ: 3509.08,4126.35 3541.79,4144.97 3541.79,4154.97 3509.08,4173.59
  region net INT: 3386.28,4018.54 3422.58,4008.57 3429.65,4015.64 3419.69,4051.94
  region net M1: 3509.08,4026.35 3541.79,4044.97 3541.79,4054.97 3509.08,4073.59
  region net RFSH: 3386.28,3918.54 3422.58,3908.57 3429.65,3915.64 3419.69,3951.94
  region net WAIT: 3509.08,3926.35 3541.79,3944.97 3541.79,3954.97 3509.08,3973.59
  region net SLTSL1: 3386.28,3818.54 3422.58,3808.57 3429.65,3815.64 3419.69,3851.94
  region net RSV5: 3509.08,3826.35 3541.79,3844.97 3541.79,3854.97 3509.08,3873.59
  region net CS2: 3386.28,3718.54 3422.58,3708.57 3429.65,3715.64 3419.69,3751.94
  region net CS12: 3509.08,3726.35 3541.79,3744.97 3541.79,3754.97 3509.08,3773.59
  region net CS1: 3509.08,3626.35 3541.79,3644.97 3541.79,3654.97 3509.08,3673.59
  region net $2N2130: 5169.87,6142.47 5180.25,6144.97 5180.25,6154.97 5169.87,6157.47
  region net $2N2106: 4581.64,6157.47 4571.25,6154.97 4571.25,6144.97 4581.64,6142.47
  region net SOUND_L: 4871.64,6252.47 4861.25,6249.97 4861.25,6239.97 4871.64,6237.47
  region net RESET: 4049.87,4442.47 4060.25,4444.97 4060.25,4454.97 4049.87,4457.47
  region net SLTSL2: 4198.23,3899.34 4203.81,3908.45 4196.74,3915.52 4187.63,3909.95
  region net CLOCK: 3948.23,5699.34 3953.81,5708.46 3946.74,5715.53 3937.62,5709.95
  region net CS1: 4333.09,3777.5 4364.25,3795 4364.25,3805 4333.09,3822.5
  region net CS1: 4293.41,3822.5 4262.25,3805 4262.25,3795 4293.41,3777.5
  region net CS2: 4133.09,3777.5 4164.25,3795 4164.25,3805 4133.09,3822.5
  region net CS2: 4093.41,3822.5 4062.25,3805 4062.25,3795 4093.41,3777.5
  region net CS12: 4333.09,3877.5 4364.25,3895 4364.25,3905 4333.09,3922.5
  region net CS12: 4293.41,3922.5 4262.25,3905 4262.25,3895 4293.41,3877.5
  region net SLTSL1: 4093.39,3922.48 4062.25,3904.97 4062.26,3894.97 4093.43,3877.48
  region net RSV5: 4333.09,3977.5 4364.25,3995 4364.25,4005 4333.09,4022.5
  region net RSV5: 4293.41,4022.5 4262.25,4005 4262.25,3995 4293.41,3977.5
  region net RFSH: 4093.39,4022.48 4062.25,4004.97 4062.26,3994.97 4093.43,3977.48
  region net RFSH: 4133.09,3977.5 4158.19,3995 4158.19,4005 4133.09,4022.5
  region net RFSH: 4133.07,3977.48 4158.19,3994.97 4158.19,4004.97 4133.12,4022.48
  region net WAIT: 4333.09,4077.5 4364.25,4095 4364.25,4105 4333.09,4122.5
  region net WAIT: 4293.41,4122.5 4262.25,4105 4262.25,4095 4293.41,4077.5
  region net INT: 4133.09,4077.5 4158.19,4095 4158.19,4105 4133.09,4122.5
  region net INT: 4133.07,4077.48 4158.19,4094.97 4158.19,4104.97 4133.12,4122.48
  region net INT: 4093.39,4122.48 4062.25,4104.97 4062.26,4094.97 4093.43,4077.48
  region net M1: 4333.09,4177.5 4364.25,4195 4364.25,4205 4333.09,4222.5
  region net M1: 4293.41,4222.5 4262.25,4205 4262.25,4195 4293.41,4177.5
  region net BDIR: 4093.39,4222.48 4062.25,4204.97 4062.26,4194.97 4093.43,4177.48
  region net BDIR: 4133.09,4177.5 4158.19,4195 4158.19,4205 4133.09,4222.5
  region net BDIR: 4133.07,4177.48 4158.19,4194.97 4158.19,4204.97 4133.12,4222.48
  region net IORQ: 4333.09,4277.5 4364.25,4295 4364.25,4305 4333.09,4322.5
  region net IORQ: 4293.41,4322.5 4262.25,4305 4262.25,4295 4293.41,4277.5
  region net MERQ: 4133.09,4277.5 4164.25,4295 4164.25,4305 4133.09,4322.5
  region net MERQ: 4093.41,4322.5 4062.25,4305 4062.25,4295 4093.41,4277.5
  region net WR: 4333.09,4377.5 4364.25,4395 4364.25,4405 4333.09,4422.5
  region net WR: 4293.41,4422.5 4262.25,4405 4262.25,4395 4293.41,4377.5
  region net RD: 4133.09,4377.5 4158.19,4395 4158.19,4405 4133.09,4422.5
  region net RD: 4133.07,4377.48 4158.19,4394.97 4158.19,4404.97 4133.12,4422.48
  region net RD: 4093.39,4422.48 4062.25,4404.97 4062.26,4394.97 4093.43,4377.48
  region net RESET: 4333.09,4477.5 4364.25,4495 4364.25,4505 4333.09,4522.5
  region net RESET: 4293.41,4522.5 4262.25,4505 4262.25,4495 4293.41,4477.5
  region net RSV16: 4133.09,4477.5 4164.25,4495 4164.25,4505 4133.09,4522.5
  region net RSV16: 4093.41,4522.5 4062.25,4505 4062.25,4495 4093.41,4477.5
  region net A9: 4333.09,4577.5 4364.25,4595 4364.25,4605 4333.09,4622.5
  region net A9: 4293.41,4622.5 4262.25,4605 4262.25,4595 4293.41,4577.5
  region net A15: 4133.09,4577.5 4164.25,4595 4164.25,4605 4133.09,4622.5
  region net A15: 4093.41,4622.5 4062.25,4605 4062.25,4595 4093.41,4577.5
  region net A11: 4333.09,4677.5 4364.25,4695 4364.25,4705 4333.09,4722.5
  region net A11: 4293.41,4722.5 4262.25,4705 4262.25,4695 4293.41,4677.5
  region net A10: 4093.41,4722.5 4062.25,4705 4062.25,4695 4093.41,4677.5
  region net A10: 4133.09,4677.5 4164.25,4695 4164.25,4705 4133.09,4722.5
  region net A7: 4333.09,4777.5 4364.25,4795 4364.25,4805 4333.09,4822.5
  region net A7: 4293.41,4822.5 4262.25,4805 4262.25,4795 4293.41,4777.5
  region net A6: 4133.09,4777.5 4164.25,4795 4164.25,4805 4133.09,4822.5
  region net A6: 4093.39,4822.48 4062.25,4804.97 4062.26,4794.97 4093.43,4777.48
  region net A12: 4333.09,4877.5 4364.25,4895 4364.25,4905 4333.09,4922.5
  region net A12: 4293.41,4922.5 4262.25,4905 4262.25,4895 4293.41,4877.5
  region net A8: 4133.09,4877.5 4164.25,4895 4164.25,4905 4133.09,4922.5
  region net A8: 4093.39,4922.48 4062.25,4904.97 4062.26,4894.97 4093.43,4877.48
  region net A14: 4333.09,4977.5 4364.25,4995 4364.25,5005 4333.09,5022.5
  region net A14: 4293.41,5022.5 4262.25,5005 4262.25,4995 4293.41,4977.5
  region net A13: 4133.09,4977.5 4164.25,4995 4164.25,5005 4133.09,5022.5
  region net A13: 4093.39,5022.48 4062.25,5004.97 4062.26,4994.97 4093.43,4977.48
  region net A1: 4333.09,5077.49 4364.25,5094.99 4364.25,5104.99 4333.09,5122.49
  region net A1: 4293.41,5122.49 4262.25,5104.99 4262.25,5094.99 4293.41,5077.49
  region net A0: 4133.09,5077.49 4164.25,5094.99 4164.25,5104.99 4133.09,5122.49
  region net A0: 4093.39,5122.48 4062.25,5104.97 4062.25,5094.97 4093.42,5077.48
  region net A3: 4333.09,5177.49 4364.25,5194.99 4364.25,5204.99 4333.09,5222.49
  region net A3: 4293.41,5222.49 4262.25,5204.99 4262.25,5194.99 4293.41,5177.49
  region net A2: 4133.09,5177.49 4164.25,5194.99 4164.25,5204.99 4133.09,5222.49
  region net A2: 4093.39,5222.48 4062.25,5204.97 4062.25,5194.97 4093.42,5177.48
  region net A5: 4333.09,5277.49 4364.25,5294.99 4364.25,5304.99 4333.09,5322.49
  region net A5: 4293.41,5322.49 4262.25,5304.99 4262.25,5294.99 4293.41,5277.49
  region net A4: 4133.09,5277.49 4164.25,5294.99 4164.25,5304.99 4133.09,5322.49
  region net A4: 4093.39,5322.48 4062.25,5304.97 4062.25,5294.97 4093.42,5277.48
  region net D1: 4333.09,5377.49 4364.25,5394.99 4364.25,5404.99 4333.09,5422.49
  region net D1: 4293.41,5422.49 4262.25,5404.99 4262.25,5394.99 4293.41,5377.49
  region net D0: 4133.09,5377.49 4164.25,5394.99 4164.25,5404.99 4133.09,5422.49
  region net D0: 4093.39,5422.48 4062.25,5404.97 4062.25,5394.97 4093.42,5377.48
  region net D3: 4333.09,5477.49 4364.25,5494.99 4364.25,5504.99 4333.09,5522.49
  region net D3: 4293.41,5522.49 4262.25,5504.99 4262.25,5494.99 4293.41,5477.49
  region net D2: 4133.09,5477.49 4164.25,5494.99 4164.25,5504.99 4133.09,5522.49
  region net D2: 4093.39,5522.48 4062.25,5504.97 4062.25,5494.97 4093.42,5477.48
  region net D5: 4333.09,5577.49 4364.25,5594.99 4364.25,5604.99 4333.09,5622.49
  region net D5: 4293.41,5622.49 4262.25,5604.99 4262.25,5594.99 4293.41,5577.49
  region net D4: 4093.41,5622.49 4062.25,5604.99 4062.25,5594.99 4093.41,5577.49
  region net D4: 4133.09,5577.49 4164.25,5594.99 4164.25,5604.99 4133.09,5622.49
  region net D7: 4333.09,5677.49 4364.25,5694.99 4364.25,5704.99 4333.09,5722.49
  region net D7: 4293.41,5722.49 4262.25,5704.99 4262.25,5694.99 4293.41,5677.49
  region net D6: 4133.09,5677.49 4164.25,5694.99 4164.25,5704.99 4133.09,5722.49
  region net D6: 4093.41,5722.49 4062.25,5704.99 4062.25,5694.99 4093.41,5677.49
  region net GND: 4333.09,5777.49 4364.25,5794.99 4364.25,5804.99 4333.09,5822.49
  region net CLOCK: 4133.09,5777.49 4164.25,5794.99 4164.25,5804.99 4133.09,5822.49
  region net CLOCK: 4093.41,5822.49 4062.25,5804.99 4062.25,5794.99 4093.41,5777.49
  region net GND: 4333.09,5877.49 4364.25,5894.99 4364.25,5904.99 4333.09,5922.49
  region net SW1: 4133.09,5877.49 4164.25,5894.99 4164.25,5904.99 4133.09,5922.49
  region net SW1: 4093.41,5922.49 4062.25,5904.99 4062.25,5894.99 4093.41,5877.49
  region net VCC5: 4333.09,5977.49 4364.25,5992.49 4364.25,6007.49 4333.09,6022.49
  region net SW2: 4133.09,5977.49 4164.25,5994.99 4164.25,6004.99 4133.09,6022.49
  region net SW2: 4093.41,6022.49 4062.25,6004.99 4062.25,5994.99 4093.41,5977.49
  region net VCC5: 4333.09,6077.49 4364.25,6092.49 4364.25,6107.49 4333.09,6122.49
  region net VCC12L: 4133.09,6077.49 4164.25,6094.99 4164.25,6104.99 4133.09,6122.49
  region net $2N2106: 4333.09,6177.49 4364.25,6194.99 4364.25,6204.99 4333.09,6222.49
  region net VCCM12L: 4133.09,6177.49 4164.25,6194.99 4164.25,6204.99 4133.09,6222.49

## Silkscreen, mask and mechanical layers (free items; w line width, h text height)
Top Silkscreen Layer:
  text "+12V" at 3408.69,6606.99 h57.45
  text "JLCJLCJLCJLC" at 3695.24,6519.79 h20.44 r270
  text "-12V" at 3408.69,6406.99 h57.45
  text "Thank you MSXmakers! for your selfless help  msxmakers.design.blog" at 4236.36,6329.28 h38.33 r270
  text "Thanks to Jordi Solis for his meticulous guidance" at 4171.36,6300.66 h38.33 r270
  text "Thanks to the original author of umsx" at 5551.36,6280.47 h38.33 r270
  text "2018 BCH @VDR" at 5491.36,6240.07 h38.33 r270
  text "5V" at 3409.56,6206.99 h57.45
  text "uMSX Rev. 4.5 - Cartridge Board v0.1" at 4460.73,6003.39 h51.1 r270
  text "Thanks to Sergey Kiselev for the Omega MSX2+ Home Computer" at 3276.36,5905.81 h38.33 r270
  text "www.va-de-retro.com" at 5491.36,5725.17 h38.33 r270
  text "Denjhang 2023.7.8" at 3915.73,5600.75 h51.1 r270
  text "D4 Enterprise 2001" at 4689.89,5156.37 h77.88 r270
  text "ASCII Corporation 1988" at 4979.89,4976.6 h77.88 r270
  text "Kazuhiko Nishi & KDL 2022" at 3596.39,4877.96 h77.88 r270